# Altium PCB PCB1.PcbDoc (part 2 of 5)
Units mm, origin at the board's own origin, x right, y up, seen from the top; angles counter-clockwise.
Board outline 160 x 110 mm, 4 copper layers (Top Layer, Power Layer, GND Layer, Bottom Layer), stack 1.714 mm thick; 504 components, 362 nets, 1765 pads, 999 vias.
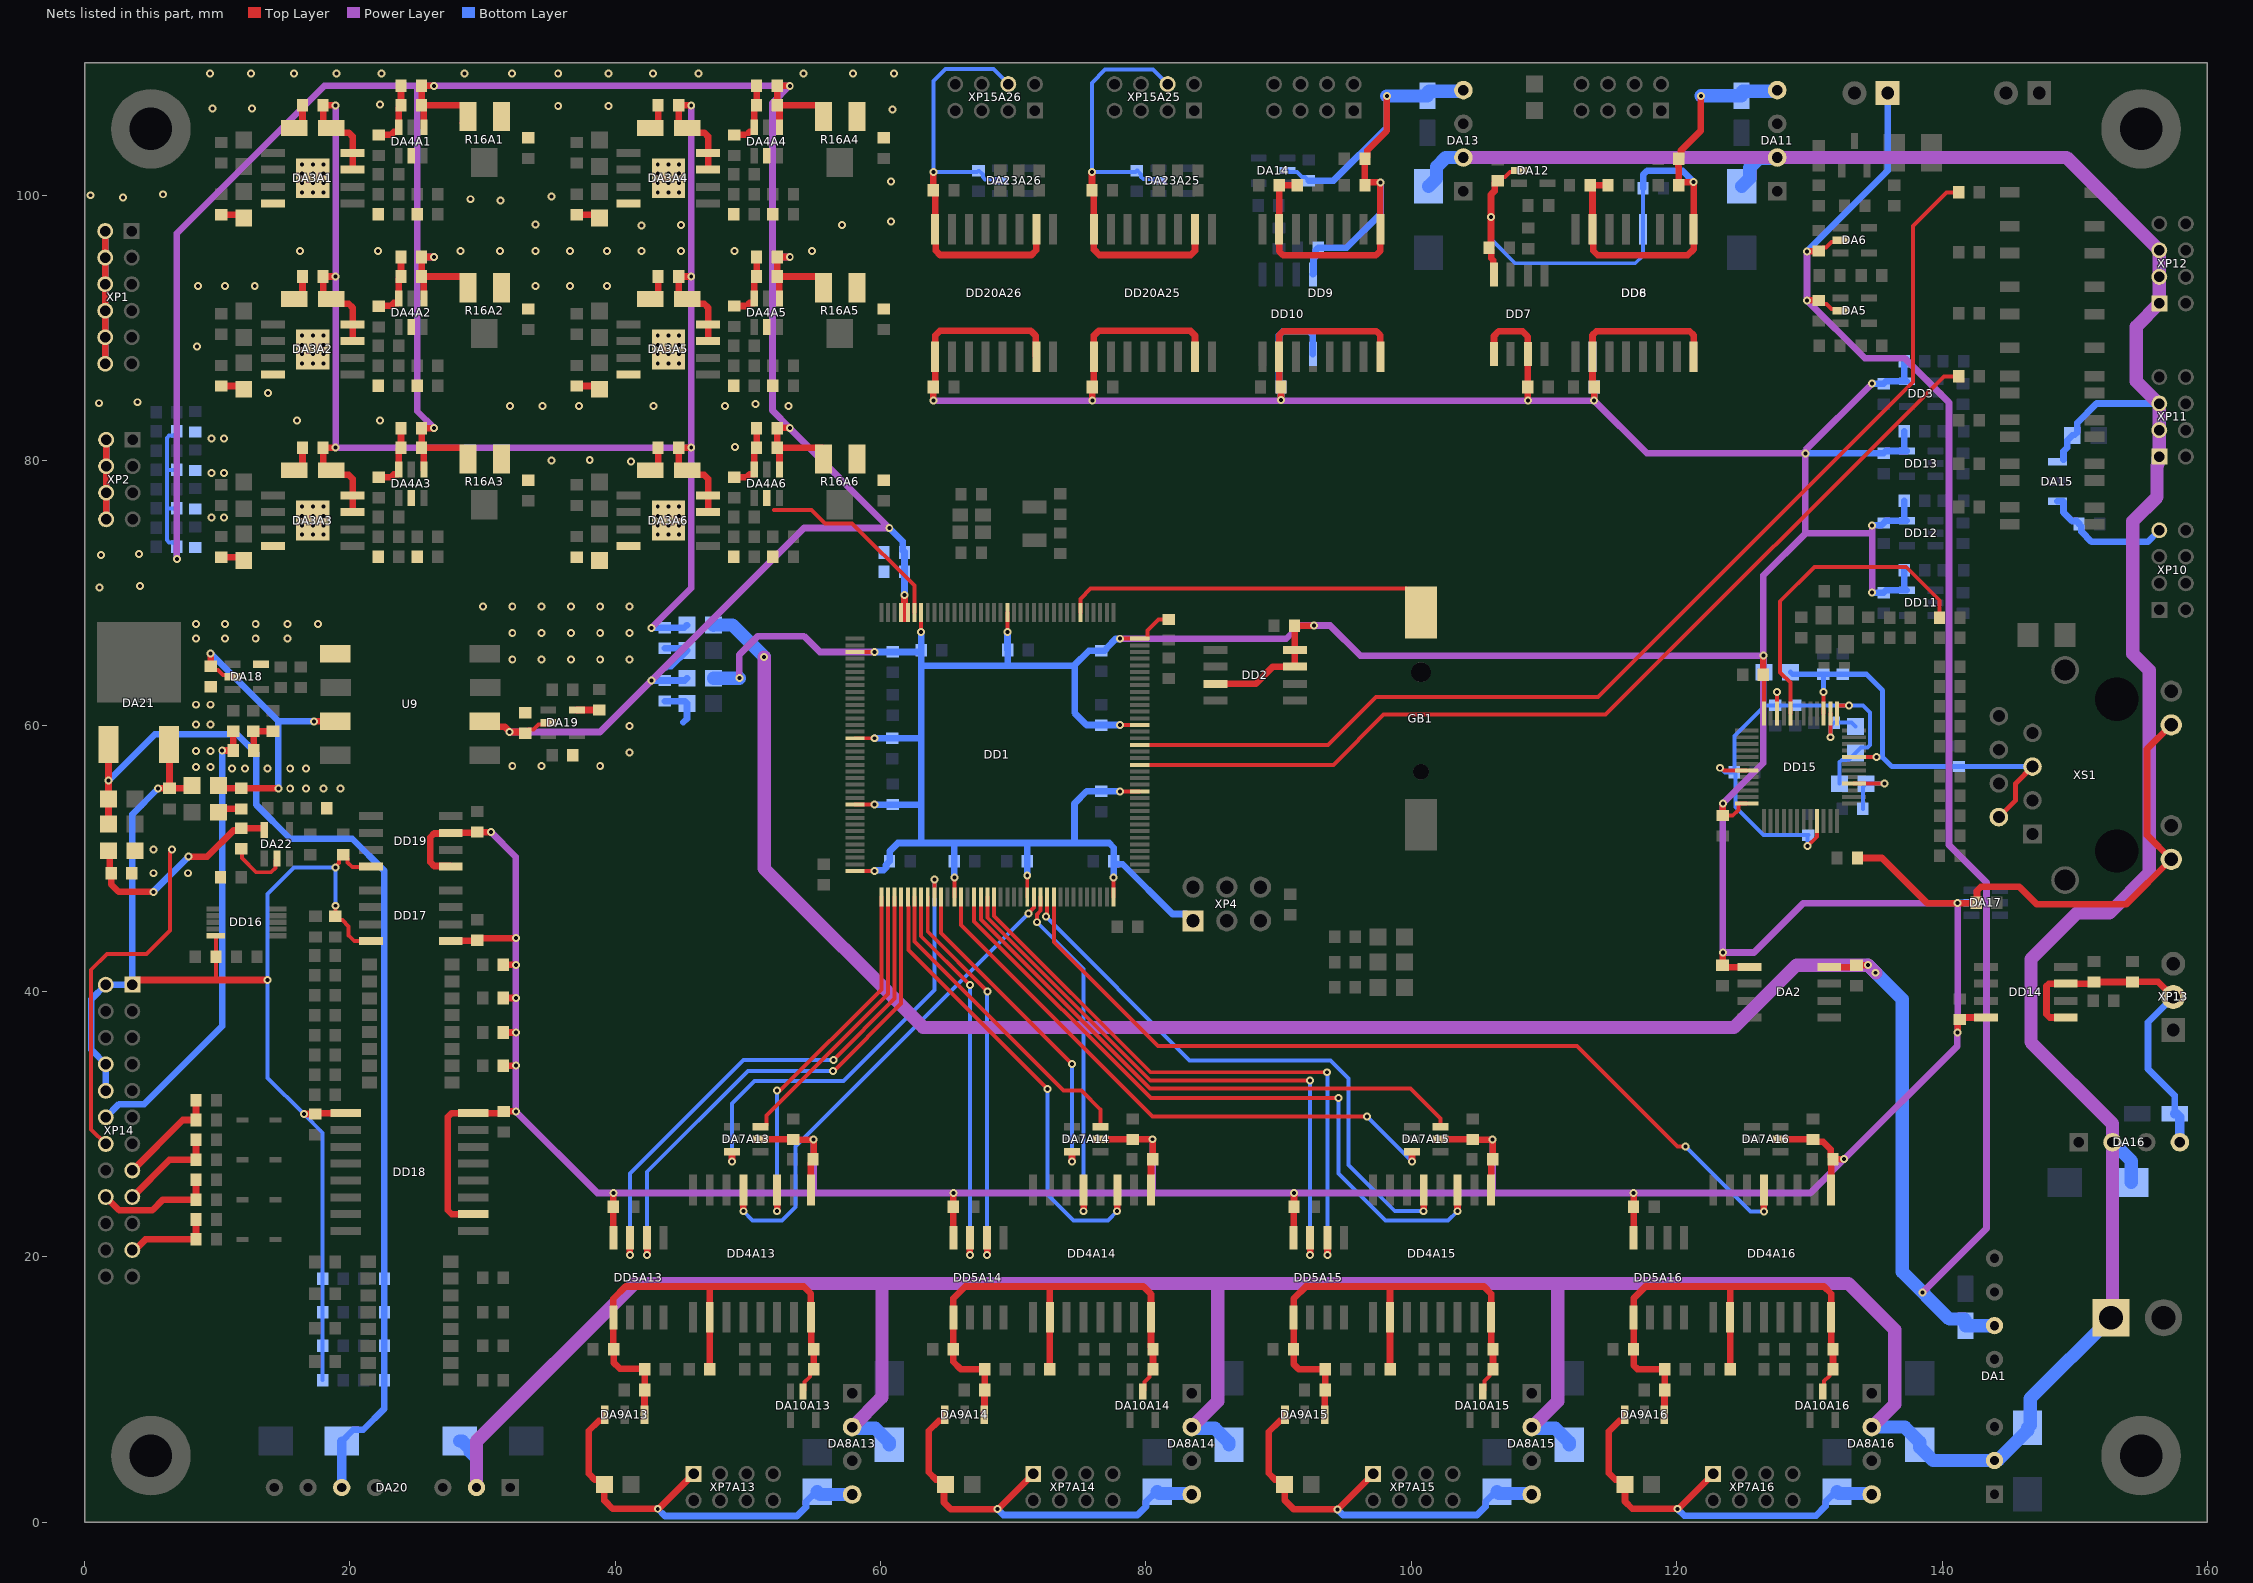
[diagram p4: the nets of this part, all layers, seen from the top]

## Part data
C1 C2 C32A1 C32A2 C32A3 C32A4 C32A5 C32A6 C44A13 C44A14 C44A15 C44A16 C48A13 C48A14 C48A15 C48A16 C55 C59 C65 C68 C81 C84 C115 C119: library part Capacitor_Polar
  C1 C44A13 C44A14 C44A15 C44A16 C55 C65 C81 C115 C119: Model="TECAP, 10 мкФ, 35 В, тип C, 10%"
  C2 C32A1 C32A2 C32A3 C32A4 C32A5 C32A6 C59 C68 C84: Model="TECAP, 10 мкФ, 10 В, тип A, 10%"
  C48A13 C48A14 C48A15 C48A16: Model="TECAP, 10 мкФ, 25 В, тип B, 10%"
C3 C4 C5 C7 C8 C9 C10 C11 C13 C14 C15 C16 C17 C18 C19 C20 C21 C22 C23 C24 C25 C26 C27 C28 C29A1 C29A2 C29A3 C29A4 C29A5 C29A6 C30A1 C30A2 C30A3 C30A4 C30A5 C30A6 C31A1 C31A2 C31A3 C31A4 C31A5 C31A6 C33A1 C33A2 C33A3 C33A4 C33A5 C33A6 C34A1 C34A2 C34A3 C34A4 C34A5 C34A6 C35A1 C35A2 C35A3 C35A4 C35A5 C35A6 C36A1 C36A2 C36A3 C36A4 C36A5 C36A6 C37A7 C37A8 C37A9 C37A10 C38 C39 C40 C41 C42 C43 C45A13 C45A14 C45A15 C45A16 C46A13 C46A14 C46A15 C46A16 C47A13 C47A14 C47A15 C47A16 C49A13 C49A14 C49A15 C49A16 C50A13 C50A14 C50A15 C50A16 C51A13 C51A14 C51A15 C51A16 C52A13 C52A14 C52A15 C52A16 C53A13 C53A14 C53A15 C53A16 C54A13 C54A14 C54A15 C54A16 C56 C57 C58 C60 C61 C62 C63 C64 C66 C67 C69 C70 C71 C72 C73 C74 C75 C76 C77 C78 C79 C80 C82 C83 C85 C86 C88 C89 C90 C91 C93 C95 C96 C97 C98 C99 C100 C101 C102 C103 C104 C105 C106 C107 C108 C109 C110 C111 C112 C113 C114 C116 C117 C118 C120 C121 C122 C123 C124A25 C124A26 C125A25 C125A26 C126A25 C126A26 C127A25 C127A26: library part Capacitor, Manufacturer=Murata
  C3 C4 C5 C8 C10 C11 C14 C16 C17 C18 C19 C20 C21 C22 C23 C25 C26 C27 C28 C29A1 C29A2 C29A3 C29A4 C29A5 C29A6 C31A1 C31A2 C31A3 C31A4 C31A5 C31A6 C33A1 C33A2 C33A3 C33A4 C33A5 C33A6 C35A1 C35A2 C35A3 C35A4 C35A5 C35A6 C37A7 C37A8 C37A9 C37A10 C38 C39 C40 C43 C45A13 C45A14 C45A15 C45A16 C46A13 C46A14 C46A15 C46A16 C47A13 C47A14 C47A15 C47A16 C49A13 C49A14 C49A15 C49A16 C50A13 C50A14 C50A15 C50A16 C53A13 C53A14 C53A15 C53A16 C54A13 C54A14 C54A15 C54A16 C56 C57 C58 C60 C61 C62 C63 C64 C66 C67 C69 C70 C71 C72 C74 C78 C79 C80 C82 C83 C85 C86 C88 C89 C90 C91 C93 C95 C96 C97 C98 C99 C100 C101 C102 C103 C104 C105 C106 C108 C109 C110 C111 C112 C113 C114 C117 C118 C120 C121 C122 C123 C124A25 C124A26 C125A25 C125A26 C127A25 C127A26: Model=GRM188R71H104KA93D
  C7 C13: Model=GRM1885C1H180FA01D
  C9 C15 C24 C36A1 C36A2 C36A3 C36A4 C36A5 C36A6: Model=GRM188R61H225KE11D
  C30A1 C30A2 C30A3 C30A4 C30A5 C30A6: Model=GRM1885C1H100JA01D
  C34A1 C34A2 C34A3 C34A4 C34A5 C34A6 C52A13 C52A14 C52A15 C52A16 C126A25 C126A26: Model=GRM188R71H103JA01D
  C41 C107: Model=GRM1885C1H101JA01D
  C42 C75 C76 C77: Model=GRM188R61H105KAALD
  C51A13 C51A14 C51A15 C51A16 C73 C116: Model=GRM219R71H334KA88D
C6 C12 C87 C92 C94: library part Capacitor, Manufacturer=Yageo
  C6 C12 C92 C94: Model=CC0603CRNPO9BN8R0
  C87: Model=CC1206KKX7RDBB102
DA1: library part TMR3, Manufacturer="Traco Power", Model="TMR 3-2411"
DA2: library part KFXXBD-TR, Manufacturer=STMicroelectronics, Model=KF33BD-TR
DA3A1 DA3A2 DA3A3 DA3A4 DA3A5 DA3A6 DD8 DD16: Manufacturer="Analog Devices"
  DA3A1 DA3A2 DA3A3 DA3A4 DA3A5 DA3A6: Model=ADA4817-1ARDZ
  DD8: Model=ADM3054BRWZ
  DD16: Model=ADM101EARM
DA4A1 DA4A2 DA4A3 DA4A4 DA4A5 DA4A6: library part TLV3501, Manufacturer="Texas Instruments", Model=TLV3501AIDBVR
DA5 DA6 DA10A13 DA10A14 DA10A15 DA10A16 DA12 DA14 DA18 DA19 DA23A25 DA23A26: library part LMC7101, Manufacturer="Texas Instruments", Model=LMC7101BIM5
DA7A13 DA7A14 DA7A15 DA7A16: library part SN74LVC1G3157, Manufacturer="Texas Instruments", Model=SN74LVC1G3157DBV
DA8A13 DA8A14 DA8A15 DA8A16 DA11 DA13 DA16: library part TME, Manufacturer="Traco Power"
  DA8A13 DA8A14 DA8A15 DA8A16: Model="TME 2412S"
  DA11 DA13 DA16: Model="TME 2405S"
DA9A13 DA9A14 DA9A15 DA9A16 DA15: library part LD2981ABU50TR, Manufacturer=STMicroelectronics
  DA9A13 DA9A14 DA9A15 DA9A16: Model=L78L05ABUTR
  DA15: Model=L78L12ABUTR
DA17: library part TPD4S009, Manufacturer="Texas Instruments", Model=TPD4S009DBVR
DA20: library part TMR4, Manufacturer="Traco Power", Model="TMR 4-2415"
DA21: library part L78M, Manufacturer=STMicroelectronics, Model=L78M05CDT-TR
DA22: library part LM7301IM5, Manufacturer="Texas Instruments", Model=LM7301IM5X/NOPB
DD1: library part STM32F405ZG, Manufacturer=STMicroelectronics, Model=STM32F405ZGT6
DD2: library part W25Q, Manufacturer=Winbond, Model=W25Q16JVSNIQ
DD3 DD11 DD12 DD13: library part SN74LVC1G17, Manufacturer="Texas Instruments", Model=SN74LVC1G17DBV
DD4A13 DD4A14 DD4A15 DD4A16 DD18: library part ADUM1400, Manufacturer="Analog Devices", Model=ADUM1400CRW
DD5A13 DD5A14 DD5A15 DD5A16: library part ADUM1200, Manufacturer="Analog Devices", Model=ADUM1200CR
DD6 DD9 DD20A25 DD20A26: library part ADUM1401, Manufacturer="Analog Devices", Model=ADUM1401CRW
DD7 DD10 DD14 DD19: library part ADUM1100, Manufacturer="Analog Devices", Model=ADUM1100BR
DD15: library part W5100S, Manufacturer=Wiznet, Model=W5100S-L
DD17: library part ADUM1201, Manufacturer="Analog Devices", Model=ADUM1201CR
GB1: library part Accumulator, Manufacturer=Connfly, Model=DS1092-12-N8S
L1 L2 L3 L4 L5 L6 L7: library part Inductor, Manufacturer=Murata, Model=BLM21PG221SN1D
R1 R2 R3 R4 R5 R6 R7 R8 R9A1 R9A2 R9A3 R9A4 R9A5 R9A6 R10A1 R10A2 R10A3 R10A4 R10A5 R10A6 R11A1 R11A2 R11A3 R11A4 R11A5 R11A6 R12A1 R12A2 R12A3 R12A4 R12A5 R12A6 R13A1 R13A2 R13A3 R13A4 R13A5 R13A6 R14A1 R14A2 R14A3 R14A4 R14A5 R14A6 R15A1 R15A2 R15A3 R15A4 R15A5 R15A6 R17A7 R17A8 R17A9 R17A10 R18A7 R18A8 R18A9 R18A10 R19 R20 R21 R22 R23 R24 R25 R26 R27 R28A13 R28A14 R28A15 R28A16 R29A13 R29A14 R29A15 R29A16 R30A13 R30A14 R30A15 R30A16 R31 R32 R33 R34 R35 R36 R37 R38 R39 R40 R41 R42 R43 R44 R45 R46 R47 R48 R49 R50 R51 R52 R53 R54 R55 R56 R57 R58 R59 R60 R61 R62 R63 R64 R65 R66 R67 R68 R69 R70 R71 R72 R73 R74 R75 R76 R77 R78 R79 R80 R81 R82 R83 R84 R85 R86 R87 R88 R89 R90 R91 R92 R93 R94 R95 R96 R97 R98 R99 R100 R101 R102 R103 R104 R109 R110 R111 R112 R113 R114 R115 R116 R117A25 R117A26 R118A25 R118A26: library part Resistor, Manufacturer=Yageo
  R1 R2 R109 R111: Model=RC0805FR-070RL
  R3 R7 R12A1 R12A2 R12A3 R12A4 R12A5 R12A6 R13A1 R13A2 R13A3 R13A4 R13A5 R13A6 R14A1 R14A2 R14A3 R14A4 R14A5 R14A6 R15A1 R15A2 R15A3 R15A4 R15A5 R15A6 R17A7 R17A8 R17A9 R17A10 R18A7 R18A8 R18A9 R18A10 R19 R21 R23 R24 R27 R28A13 R28A14 R28A15 R28A16 R29A13 R29A14 R29A15 R29A16 R30A13 R30A14 R30A15 R30A16 R31 R32 R34 R35 R36 R37 R38 R39 R43 R44 R45 R53 R68 R69 R70 R71 R72 R73 R75 R76 R77 R78 R79 R80 R81 R86 R87 R89 R91 R92 R93 R95 R104 R110 R112 R113 R115 R116 R117A25 R117A26 R118A25 R118A26: Model=RC0603FR-0710KL
  R4 R5 R6 R22 R46 R47 R48 R49 R50 R51 R52 R96 R97 R98 R99: Model=RC0603FR-07200RL
  R8 R67: Model=RC0603JR-070RL
  R9A1 R9A2 R9A3 R9A4 R9A5 R9A6 R10A1 R10A2 R10A3 R10A4 R10A5 R10A6: Model=RC0805FR-071ML
  R11A1 R11A2 R11A3 R11A4 R11A5 R11A6: Model=RC0603FR-075K1L
  R20 R66: Model=RC0603FR-0712KL
  R25: Model=RC1210FR-0710RL
  R26 R40 R41 R42 R60 R63: Model=RC0603FR-071KL
  R33: Model=RC0805FR-07120RL
  R54 R55 R56 R57: Model=RC0603FR-0749R9L
  R58 R59 R61 R62: Model=RC0603FR-073R3L
  R64: Model=RC0603FR-07300RL
  R65: Model=RC0603FR-071ML
  R74: Model=RC0603FR-0722KL
  R82 R83 R84 R85: Model=RC0603FR-07390RL
  R88: Model=RC0603FR-07330RL
  R90 R94: Model=RC0603FR-07150KL
  R100 R101 R102 R103: Model=RC0603FR-070RL
  R114: Model=RC0603FR-076K04L
R16A1 R16A2 R16A3 R16A4 R16A5 R16A6: library part Resistor_Variable, Manufacturer=Bourns, Model=3224W-1-104E
R105 R106 R107 R108: library part Resistor
U1 U2 U3 U4: library part TLP291, Manufacturer=Toshiba, Model=TLP291(GB-TP,SE
U5 U6 U7: Manufacturer=Toshiba, Model=TLP127
U8 U10: library part TLP281-4, Manufacturer=Toshiba, Model=TLP291-4
U9: library part HCNR200, Manufacturer=Avago, Model=HCNR-200-500E
VD1 VD2 VD3: library part LED, Manufacturer=Kingbright
  VD1: Model=KP-2012MGC
  VD2: Model=KP-2012SEC
  VD3: Model=KP-2012EC
VD4 VD5 VD6 VD7: library part Diode_Zener, Manufacturer=Nexperia, Model=BZX384-C5V1
VT1: library part "MOSFET N-channel", Manufacturer=UMW, Model=AO3400A
XP1: library part Connector-12, Manufacturer=JST, Model=B12B-PHDSS
XP2 XP7A13 XP7A14 XP7A15 XP7A16 XP8 XP9 XP10 XP11 XP12 XP15A25 XP15A26: library part Connector-8, Manufacturer=JST, Model=B8B-PHDSS
XP3 XP5 XP6: library part Connector-2, Manufacturer=JST
  XP3: Model=B2P-VH
  XP5 XP6: Model=B2B-EH-A
XP4: library part Connector-6, Manufacturer=Connfly, Model=PLD-6
XP13: library part Connector-3, Manufacturer=JST, Model=B3B-EH-A
XP14: library part Connector-24, Manufacturer=JST, Model=B24B-PHDSS
XS1: Manufacturer=LINK-PP, Model=LPJD0012BENL
ZQ1: library part Quartz_Resonator_4-pin, Manufacturer=NDK, Model=NX2520SA-16MHZ-STD-CSW-5
ZQ2: library part Quartz_Resonator, Manufacturer=NDK, Model="NX3215SA- 32.768K-STD-MUA-8"
ZQ3: library part Quartz_Resonator_4-pin, Manufacturer=TXC, Model=7M-25.000MAAJ-T

## Free pads (board coordinates)
  round 6 hole 3.2: ""(5,5) ""(5,105) ""(155,5) ""(155,105)

## Via types
v1: diameter 0.6, hole 0.3, Top Layer to Bottom Layer, tented both sides, 927 vias
v2: diameter 0.6, hole 0.3, Top Layer to Bottom Layer, 72 vias

## Nets (pads, with @x,y where several pads share a name; then routed paths per layer and width w, separated by ;. In a path a pad name is that pad's centre, name@x,y a point inside that pad or via, vN(x,y) a via of type N, cw(c..) or ccw(c..) an arc to the next point about the centre after c; other vN are vias at no path point)
1V2A: C96.1 DD15.4 L4.2 | length 5.7
  Top Layer w0.3: DD15.4@133.375,55.65 v1(135.675,55.65)
  Bottom Layer w0.3: C96.1@134.025,53.75 134.025,55.4 L4.2@134.275,55.65 v1(135.675,55.65)
1V2D: C95.1 C99.1 C101.1 C102.1 DD15.13 DD15.22 DD15.31 DD15.45 L3.2 L4.1 | length 40.4
  Top Layer w0.3: v1(123.275,56.85) 123.356,56.85 123.556,56.65 DD15.31@125.275,56.65 ; DD15.22@127.575,60.95 127.575,61.8 v1(127.575,62.55) ; v1(129.875,50.95) 130.575,51.65 DD15.45@130.575,52.85 ; DD15.13@132.075,60.95 132.075,61.55 v1(132.975,61.55)
  Bottom Layer w0.3: v1(123.275,56.85) 123.625,56.5 C101.1@124.345,56.5 ; C95.1@127.575,61.56 C99.1@128.925,61.56 128.93,61.555 132.97,61.555 v1(132.975,61.55) 134.05,61.55 134.575,61.025 134.575,58.575 134.366,58.366 133.891,58.366 132.99,57.465 132.829,57.465 132.814,57.45 132.451,57.45 132.275,57.274 L4.1@132.275,55.65 ; v1(127.575,62.55) 127.575,61.71 C95.1@127.425,61.56 126.66,61.56 124.345,59.245 C101.1@124.345,56.5 ; v1(129.875,50.95) 129.875,51.72 C102.1@129.925,51.77 126.555,51.77 124.424,53.901 124.424,56.421 C101.1@124.345,56.5
1V2O: C91.1 DD15.14 L3.1 | length 4.7
  Top Layer w0.3: v1(131.575,59.15) DD15.14@131.575,60.95
  Bottom Layer w0.3: v1(131.575,59.15) 131.575,59.749 131.6,59.774 131.6,59.975 C91.1@131.875,60.25 133.175,60.25 L3.1@133.475,59.95
+3.3V: C5.1 C9.1 C10.2 C16.2 C17.1 C18.1 C19.1 C21.2 C22.2 C23.2 C25.1 C26.2 C27.1 C28.1 C43.1 C45A13.1 C45A14.1 C45A15.1 C45A16.1 C46A13.1 C46A14.1 C46A15.1 C46A16.1 C47A13.1 C47A14.1 C47A15.1 C47A16.1 C56.1 C57.1 C58.1 C66.1 C67.1 C78.1 C79.1 C80.1 C85.1 C88.1 C93.1 C98.1 C110.1 C111.1 C114.1 C124A25.1 C124A26.1 DA2.1 DA7A13.5 DA7A14.5 DA7A15.5 DA7A16.5 DA17.5 DD1.17 DD1.30 DD1.39 DD1.52 DD1.62 DD1.72 DD1.84 DD1.95 DD1.108 DD1.121 DD1.131 DD1.144 DD2.3 DD2.7 DD2.8 DD3.5 DD4A13.1 DD4A14.1 DD4A15.1 DD4A16.1 DD5A13.8 DD5A14.8 DD5A15.8 DD5A16.8 DD6.10 DD6.16 DD7.1 DD7.3 DD8.7 DD9.10 DD9.16 DD10.1 DD10.3 DD11.5 DD12.5 DD13.5 DD14.8 DD15.24 DD15.36 DD17.1 DD18.10 DD18.16 DD19.1 DD19.3 DD20A25.1 DD20A25.7 DD20A26.1 DD20A26.7 L2.1 L5.1 R8.2 R27.2 R43.2 R44.2 R45.2 R68.2 R89.1 R91.1 R92.1 R93.1 XP4.1 XS1.9 XS1.11 | length 728.7
  Top Layer w0.3: C111.1@31.47,30.82 C111.1@31.6,30.95 ; DD1.72@58.075,49.075 v1(59.55,49.075) ; DD1.62@58.075,54.075 v1(59.55,54.075) ; DD1.52@58.075,59.075 v1(59.55,59.075) ; DD1.39@58.075,65.575 v1(59.55,65.575) ; v1(63.05,67.075) DD1.30@63.05,68.55 ; DD1.84@65.55,47.1 65.55,47.825 65.55,48.57 v1(65.564,48.583) ; v1(69.55,67.075) DD1.17@69.55,68.55 ; DD1.95@71.05,47.1 v1@71.05,48.575 ; DD1.108@77.55,47.1 v1(77.55,48.575) ; v1(78.025,55.075) DD1.121@79.525,55.075 ; v1(78.05,60.075) DD1.131@79.525,60.075 ; v1(78.05,66.575) 78.8,66.575 DD1.144@79.525,66.575 80.1,66.575 80.1,67.2 80.925,68.025 R8.2@81.7,68.025 ; C93.1@123.476,53.249 124.224,53.249 124.651,53.676 124.651,54.15 DD15.36@125.275,54.15 ; C98.1@126.525,63.85 126.575,63.8 DD15.24@126.575,60.95
  Top Layer w0.5: DD17.1@27.6,43.8 29.55,43.8 C110.1@29.6,43.85 29.756,44.006 32.481,44.006 v1(32.5,44.025) ; DD19.1@27.6,49.4 27.55,49.45 26.343,49.45 26.05,49.743 26.05,51.607 26.343,51.9 27.55,51.9 DD19.3@27.6,51.95 29.55,51.95 C114.1@29.6,52 v1(30.625,52) ; DD18.10@29.3,23.2 29.296,23.204 27.668,23.204 27.375,23.496 27.375,30.524 27.668,30.816 29.296,30.816 DD18.16@29.3,30.82 C111.1@31.47,30.82 ; R93.1@31.55,34.4 v1(32.5,34.4) ; R92.1@31.55,36.9 v1(32.5,36.9) ; R91.1@31.55,39.5 v1(32.5,39.5) ; R89.1@31.55,42 v1(32.5,42) ; C111.1@31.6,30.95 v1(32.5,30.95) ; DD5A13.8@39.85,21.425 C47A13.1@39.85,23.775 v1(39.85,24.8) ; DA7A13.5@50.95,28.85 50.963,28.838 C45A13.1@53.387,28.838 ; C45A13.1@53.4,28.825 v1(54.95,28.825) 54.95,27.4 C46A13.1@54.9,27.35 ; DD4A13.1@54.74,25.025 54.74,27.04 C46A13.1@54.9,27.2 ; v1(63.975,84.525) C124A26.1@63.975,85.55 64.11,85.685 DD20A26.1@64.11,87.825 64.11,89.435 64.45,89.775 71.325,89.775 71.68,89.42 71.68,87.875 DD20A26.7@71.73,87.825 ; DD5A14.8@65.475,21.425 C47A14.1@65.475,23.775 v1(65.475,24.8) ; v1(75.95,84.525) C124A25.1@75.95,85.55 ; C124A25.1@76.075,85.575 DD20A25.1@76.075,87.825 76.075,89.425 76.425,89.775 83.35,89.775 83.695,89.43 DD20A25.7@83.695,87.825 ; DA7A14.5@76.575,28.85 78.975,28.85 v1(80.5,28.85) C46A14.1@80.5,27.35 ; DD4A14.1@80.375,25.025 C46A14.1@80.375,27.225 ; DD2.3@85.225,63.175 88.275,63.175 89.575,64.475 DD2.7@91.225,64.475 DD2.8@91.225,65.725 91.2,65.75 C25.1@91.2,67.55 91.212,67.562 92.662,67.562 v1(92.675,67.575) ; v1(90.175,84.574) C67.1@90.175,85.55 90.175,85.575 90.04,85.71 DD9.10@90.04,87.828 90.04,89.457 90.333,89.75 97.367,89.75 97.66,89.457 DD9.16@97.66,87.828 ; DD5A15.8@91.125,21.425 91.137,21.437 91.137,23.763 C47A15.1@91.15,23.775 v1(91.15,24.8) ; DA7A15.5@102.2,28.85 104.625,28.85 104.65,28.825 v1(106.125,28.825) C46A15.1@106.125,27.35 ; DD4A15.1@106.015,25.072 C46A15.1@106.015,27.287 ; DD7.1@106.226,88.038 106.226,89.397 106.575,89.746 108.375,89.746 108.776,89.345 DD7.3@108.776,88.037 108.776,85.551 C56.1@108.775,85.55 v1(108.775,84.525) ; v1(113.775,84.525) C57.1@113.775,85.55 113.655,85.67 DD6.10@113.655,87.828 113.655,89.457 113.948,89.75 120.982,89.75 121.275,89.457 DD6.16@121.275,87.828 ; DD5A16.8@116.75,21.425 C47A16.1@116.75,23.775 v1(116.75,24.8) ; v1(123.475,42.925) 123.462,42.912 123.462,41.987 C9.1@123.45,41.975 123.599,41.826 DA2.1@125.5,41.826 ; C93.1@123.475,53.25 v1(123.475,54.15) ; C98.1@126.525,63.85 v1(126.525,65.3) ; DA7A16.5@127.825,28.85 130.3,28.85 130.325,28.825 C45A16.1@130.275,28.825 130.45,28.65 131.05,28.65 131.6,28.1 131.6,27.525 C46A16.1@131.775,27.35 ; DD4A16.1@131.645,25.025 131.645,27.22 C46A16.1@131.775,27.35 ; v1(132.625,27.35) C46A16.1@131.775,27.35 ; R68.2@133.625,50.05 135.475,50.05 138.875,46.65 v1(141.175,46.65) 142.55,46.65 C88.1@142.575,46.675 142.629,46.729 142.629,47.582 142.921,47.875 145.825,47.875 147.15,46.55 153.876,46.55 XS1.9@157.275,49.949 155.45,51.775 155.45,58.254 XS1.11@157.275,60.079 ; v1(141.175,36.9) 141.194,36.919 141.194,37.725 141.469,38 141.818,38 141.843,38.025 DD14.8@143.325,38.025
  Power Layer w0.5: v1(30.625,52) 32.5,50.125 v1(32.5,44.025) v1(32.5,42) v1(32.5,39.5) v1(32.5,36.9) v1(32.5,34.4) v1(32.5,30.95) 38.65,24.8 v1(39.85,24.8) 54.95,24.8 ; v1(49.35,63.6) 49.35,65.375 50.75,66.775 54.217,66.775 55.417,65.575 v1(59.55,65.575) ; v1(54.95,28.825) 54.95,24.8 ; v1(59.55,59.075) v1@59.569,59.094 ; v1(63.975,84.525) v1(75.95,84.525) 90.099,84.525 90.148,84.574 v1(90.175,84.574) ; v1(78.05,66.575) 90.575,66.575 91.575,67.575 v1(92.675,67.575) 93.875,67.575 96.15,65.3 v1(126.525,65.3) ; v1(80.5,28.85) 80.5,24.8 ; v1@90.175,84.525 v1(108.775,84.525) v1(113.775,84.525) 117.75,80.55 v1(129.7,80.55) ; v1(106.125,28.825) 106.125,24.85 106.075,24.8 ; v1@134.706,85.781 129.719,80.794 129.719,80.569 v1(129.7,80.55) ; v1(134.725,70.05) 134.725,74.512 ; v1(134.725,75.1) 134.725,74.512 ; 54.95,24.8 v1(65.475,24.8) 80.5,24.8 ; 80.5,24.8 v1(91.15,24.8) 106.075,24.8 ; 106.075,24.8 v1(116.75,24.8) 130.075,24.8 v1(132.625,27.35) 141.156,35.881 141.156,36.881 v1(141.175,36.9) v1(141.175,46.65) 129.55,46.65 125.825,42.925 v1(123.475,42.925) v1(123.475,54.15) 126.525,57.2 v1(126.525,65.3) ; v1(126.525,65.3) 126.525,71.337 129.7,74.512 ; 129.7,74.512 v1(129.7,80.55) ; 129.7,74.512 134.725,74.512
  Bottom Layer w0.5: v1(59.55,49.075) 59.607,49.132 60.224,49.132 60.4,49.308 60.4,49.525 C16.2@60.675,49.8 60.675,50.55 61.3,51.175 65.575,51.175 ; v1(59.55,54.075) C17.1@60.9,54.075 63.025,54.075 63.05,54.1 ; v1(59.55,59.075) C18.1@60.875,59.075 63.025,59.075 63.05,59.1 ; v1(59.55,65.575) 60.9,65.575 62.925,65.575 C5.1@63.05,65.7 ; 63.05,51.2 63.05,54.1 ; v1(63.05,67.075) C5.1@63.05,65.7 ; v1(65.564,48.583) 65.557,48.59 65.557,49.793 C21.2@65.55,49.8 65.55,51.15 65.575,51.175 ; v1(69.55,67.075) 69.562,67.062 69.562,65.737 C10.2@69.575,65.725 69.575,64.575 ; v1(71.05,48.725) C22.2@71.05,49.8 71.05,51.15 71.025,51.175 ; 74.616,64.591 74.616,60.984 75.525,60.075 76.625,60.075 v1(78.05,60.075) ; v1(77.55,48.575) 77.562,48.587 77.562,49.963 77.575,49.975 77.575,50.825 77.225,51.175 74.608,51.175 ; C23.2@77.596,49.779 77.596,49.729 77.75,49.575 78.25,49.575 81.997,45.828 83.032,45.828 XP4.1@83.55,45.31 ; v1(78.025,55.075) C28.1@76.625,55.075 75.525,55.075 74.608,54.158 74.608,51.175 ; v1(78.05,66.575) 78.031,66.556 77.706,66.556 77.05,65.9 77.05,65.85 76.875,65.675 76.825,65.675 C26.2@76.625,65.675 75.7,65.675 74.575,64.55 69.575,64.55 63.05,64.55 ; v1(90.175,84.574) C66.1@90.175,85.55 90.025,85.7 DD10.3@90.025,88.037 90.025,89.45 90.325,89.75 92.275,89.75 92.575,89.45 DD10.1@92.575,88.037 ; DD8.7@113.655,87.828 113.655,85.67 C58.1@113.775,85.55 v1(113.775,84.525) ; v1(126.525,65.3) 126.544,65.281 126.544,64.081 L5.1@126.575,64.05 ; v1(129.7,80.55) C80.1@135.6,80.55 135.775,80.725 DD13.5@137.275,80.725 ; v1(134.725,70.05) C78.1@135.6,70.05 135.775,70.225 DD11.5@137.15,70.225 ; v1(134.725,75.1) 134.752,75.1 134.777,75.125 135.425,75.125 C79.1@135.6,75.3 135.775,75.475 DD12.5@137.275,75.475 ; v1(134.725,85.8) C43.1@135.6,85.8 135.775,85.975 DD3.5@137.275,85.975 ; R43.2@137.15,71.725 137.15,70.35 137.275,70.225 DD11.5@137.35,70.225 ; R44.2@137.15,76.975 137.15,75.6 DD12.5@137.275,75.475 ; R45.2@137.15,82.225 137.15,80.85 DD13.5@137.275,80.725 ; R27.2@137.15,87.475 137.15,86.1 DD3.5@137.275,85.975 ; DD12.5@137.35,75.475 DD12.5@137.275,75.475 ; DD13.5@137.35,80.725 DD13.5@137.275,80.725 ; DD3.5@137.35,85.975 DD3.5@137.275,85.975 ; v1(141.175,46.65) 141.188,46.662 142.212,46.662 DA17.5@142.225,46.675 ; 63.05,54.1 63.05,59.1 ; 63.05,59.1 63.05,64.55 ; 63.05,64.55 C5.1@63.05,65.7 ; 65.575,51.175 71.025,51.175 ; 71.025,51.175 74.608,51.175
  Bottom Layer w1: L2.1@47.4,63.6 v1(49.35,63.6)
+3.3VA: C8.2 C11.2 C14.1 C35A1.1 C35A2.1 C35A3.1 C35A4.1 C35A5.1 C35A6.1 C36A1.1 C36A2.1 C36A3.1 C36A4.1 C36A5.1 C36A6.1 C112.1 DA4A1.4 DA4A2.4 DA4A3.4 DA4A4.4 DA4A5.4 DA4A6.4 DA19.2 DD1.32 DD1.33 L2.2 R16A1.3 R16A2.3 R16A3.3 R16A4.3 R16A5.3 R16A6.3 R17A7.1 R17A8.1 R17A9.1 R17A10.1 U9.6 | length 251.6
  Top Layer w0.3: C112.1@33.2,59.45 33.475,59.725 33.825,59.725 34.225,60.125 34.825,60.125 DA19.2@34.95,60.25
  Top Layer w0.5: DA4A3.4@25.575,79.325 25.575,80.8 C35A3.1@25.4,80.975 ; DA4A2.4@25.575,92.225 25.55,92.25 25.55,93.725 C35A2.1@25.4,93.875 ; DA4A1.4@25.575,105.125 25.55,105.15 25.55,106.625 C35A1.1@25.4,106.775 ; v1(26.35,82.45) C36A3.1@25.4,82.45 C35A3.1@25.4,80.975 ; v1(26.35,95.35) C36A2.1@25.4,95.35 C35A2.1@25.4,93.875 ; v1(26.35,108.25) C36A1.1@25.4,108.25 C35A1.1@25.4,106.775 ; R16A1.3@28.5,105.475 28.9,105.875 R16A1.3@28.9,105.925 ; R16A1.3@28.5,106.775 C35A1.1@25.4,106.775 ; R16A2.3@28.625,92.75 R16A2.3@28.9,93.025 ; R16A2.3@28.625,93.875 C35A2.1@25.4,93.875 ; R16A3.3@28.9,80.125 28.9,80.575 28.5,80.975 C35A3.1@25.4,80.975 ; U9.6@30.15,60.35 30.55,59.95 31.65,59.95 32.025,59.575 v1(32.025,59.55) 33.1,59.55 C112.1@33.2,59.45 ; C35A6.1@52.2,80.85 C36A6.1@52.2,82.325 ; C36A6.1@52.225,82.475 v1(53.15,82.475) ; DA4A6.4@52.375,79.325 52.375,80.8 C35A6.1@52.2,80.975 R16A6.3@55.6,80.975 ; DA4A5.4@52.375,92.225 52.35,92.25 52.35,93.725 C35A5.1@52.2,93.875 ; DA4A4.4@52.375,105.125 52.375,106.6 C35A4.1@52.2,106.775 R16A4.3@55.3,106.775 ; C35A4.1@52.375,106.875 52.2,107.05 C36A4.1@52.2,108.25 v1(53.15,108.25) ; v1(53.15,95.35) C36A5.1@52.2,95.35 C35A5.1@52.2,93.875 ; R16A4.3@55.3,105.475 55.7,105.875 R16A4.3@55.7,105.925 ; R16A5.3@55.425,92.75 R16A5.3@55.7,93.025 ; R16A5.3@55.425,93.875 C35A5.1@52.2,93.875 ; R16A6.3@55.6,80.025 R16A6.3@55.7,80.125 ; 61.8,68.075 v1(61.8,69.875)
  Power Layer w0.5: v1(6.95,72.6) 6.95,97.125 18.075,108.25 25.075,108.25 ; v1(26.35,82.45) 25.075,83.725 25.075,95.336 ; v1(26.35,95.35) 25.089,95.35 25.075,95.336 ; v1(32.025,59.55) 38.85,59.55 54.225,74.925 v1(60.65,74.925) 53.2,82.375 53.2,82.398 53.169,82.429 v1@53.15,82.429 ; v1(53.15,82.475) 51.85,83.775 51.85,95.362 ; v1(53.15,95.35) 51.862,95.35 51.85,95.362 ; 25.075,95.336 25.075,108.25 ; 25.075,108.25 v1(26.35,108.25) v1(53.15,108.25) 51.85,106.95 51.85,95.362
  Bottom Layer w0.3: R17A10.1@6.95,73.5 6.95,73.55 6.675,73.825 6.376,73.825 6.2,74.001 6.2,76.4 ; R17A9.1@6.95,76.4 6.2,76.4 ; R17A8.1@6.95,79.3 6.2,79.3 ; R17A7.1@6.95,82.2 6.95,82.15 6.675,81.875 6.376,81.875 6.2,81.699 6.2,79.3 ; 6.2,76.4 6.2,79.3
  Bottom Layer w0.5: v1(6.95,72.6) R17A10.1@6.95,73.5 ; v1(42.725,63.425) C14.1@43.725,63.425 45.225,63.425 L2.2@45.4,63.6 ; v1@60.669,74.906 61.67,73.905 61.67,73.205 C11.2@61.8,73.075 ; v1(61.8,69.875) C11.2@61.8,73.125
+3.3VA_ETH: C86.1 C97.1 C100.1 DD15.8 DD15.15 L5.2 XS1.2 XS1.5 | length 34.1
  Top Layer w0.3: DD15.15@131.075,60.95 131.075,61.8 v1(131.075,62.55) ; DD15.8@133.375,57.65 v1(135.075,57.65)
  Top Layer w0.381: XS1.2@144.275,53.127 145.55,54.402 145.55,55.672 XS1.5@146.815,56.937
  Bottom Layer w0.381: L5.2@128.575,64.05 128.725,63.9 C97.1@131.05,63.9 ; v1(131.075,62.55) 131.063,62.563 131.063,63.887 C97.1@131.05,63.9 ; v1(135.075,57.65) 135.523,57.65 135.523,62.677 134.3,63.9 C100.1@132.517,63.9 C97.1@131.05,63.9 ; 135.523,57.627 136.213,56.937 C86.1@141.254,56.937 XS1.5@146.815,56.937
+5V: C2.1 C4.1 C39.1 C40.1 DA1.6 DA2.8 DA5.2 DA6.2 L1.1 XP5.1 | length 255.8
  Top Layer w0.3: C39.1@130.7,92.075 130.975,91.8 131.275,91.8 131.65,91.425 132.225,91.425 DA5.2@132.35,91.3 ; C40.1@130.7,95.8 130.975,96.075 131.25,96.075 131.65,96.475 132.225,96.475 DA6.2@132.35,96.6
  Top Layer w0.5: v1(129.825,92.075) C39.1@130.7,92.075 ; v1(129.825,95.775) 129.838,95.787 130.688,95.787 C40.1@130.7,95.8 ; DA2.8@131.5,41.826 133.326,41.826 133.525,42.025 C4.1@133.575,42.025 ; C4.1@133.55,41.975 v1(134.425,41.975)
  Power Layer w0.5: v1(129.825,95.775) v1(129.825,92.075) 134.175,87.725 137.175,87.725 140.525,84.375 140.525,51.025 143.35,48.2 143.35,22.125 v1(138.525,17.3)
  Power Layer w1: v1(51.225,65.2) 51.225,49.25 63.2,37.275 124.325,37.275 129.025,41.975 v1(134.425,41.975) v1(135,41.4)
  Bottom Layer w0.5: v1(129.825,95.775) 135.9,101.85 XP5.1@135.9,107.7
  Bottom Layer w1: L1.1@47.4,67.6 47.417,67.617 48.808,67.617 v1(51.225,65.2) ; v1(134.425,41.975) v1(135,41.4) 137,39.4 137,18.85 140.552,15.298 141.675,15.298 141.775,15.198 C2.1@141.775,14.8 DA1.6@143.95,14.8
+5V_DRVA13: C49A13.1 C50A13.1 C53A13.1 C54A13.1 DA9A13.1 DA10A13.2 DD4A13.10 DD4A13.16 DD5A13.1 R29A13.1 R30A13.1 | length 40.3
  Top Layer w0.3: DA10A13.2@54.15,9.825 54.275,9.95 54.275,10.55 54.675,10.95 54.675,11.25 C53A13.1@54.95,11.525
  Top Layer w0.5: C50A13.1@39.875,13.025 39.875,12.025 40.35,11.55 42.225,11.55 C54A13.1@42.225,9.95 ; C50A13.1@40.025,13.075 39.85,13.25 DD5A13.1@39.85,15.425 39.85,16.825 40.775,17.75 47.1,17.75 ; DA9A13.1@42.2,8.075 C54A13.1@42.2,9.925 ; DD4A13.10@47.12,15.425 47.12,17.73 47.1,17.75 ; R30A13.1@47.125,11.525 DD4A13.10@47.125,15.42 ; DD4A13.16@54.74,15.425 54.74,17.21 54.2,17.75 47.1,17.75 ; DD4A13.16@54.765,15.4 54.775,15.39 54.775,13.2 C49A13.1@54.95,13.025 C53A13.1@54.95,11.525
+5V_DRVA14: C49A14.1 C50A14.1 C53A14.1 C54A14.1 DA9A14.1 DA10A14.2 DD4A14.10 DD4A14.16 DD5A14.1 R29A14.1 R30A14.1 | length 40.3
  Top Layer w0.3: DA10A14.2@79.75,9.825 79.875,9.95 79.875,10.55 80.25,10.925 80.25,11.25 C53A14.1@80.525,11.525
  Top Layer w0.5: DA9A14.1@67.825,8.075 C54A14.1@67.825,9.925 ; C54A14.1@67.85,9.95 R29A14.1@67.85,11.525 66.025,11.525 65.475,12.075 C50A14.1@65.475,13.025 DD5A14.1@65.475,15.425 65.475,16.85 66.375,17.75 72.755,17.75 ; R30A14.1@72.75,11.525 72.753,11.528 72.753,15.423 DD4A14.10@72.755,15.425 72.755,17.75 ; C53A14.1@80.525,11.525 C49A14.1@80.525,13.025 80.375,13.175 80.375,17.175 79.8,17.75 72.755,17.75
+5V_DRVA15: C49A15.1 C50A15.1 C53A15.1 C54A15.1 DA9A15.1 DA10A15.2 DD4A15.10 DD4A15.16 DD5A15.1 R29A15.1 R30A15.1 | length 40.4
  Top Layer w0.3: DA10A15.2@105.375,9.825 105.5,9.95 105.5,10.625 105.875,11 105.875,11.25 C53A15.1@106.15,11.525
  Top Layer w0.5: DA9A15.1@93.475,8.075 C54A15.1@93.475,9.925 ; C54A15.1@93.5,9.95 R29A15.1@93.5,11.525 91.5,11.525 91.125,11.9 C50A15.1@91.125,13.025 DD5A15.1@91.125,15.425 91.125,16.825 92.051,17.751 105.474,17.751 106.015,17.21 DD4A15.16@106.015,15.425 106.015,13.16 C49A15.1@106.15,13.025 C53A15.1@106.15,11.525 ; R30A15.1@98.395,11.53 DD4A15.10@98.395,15.425 98.395,17.75
+5V_DRVA16: C49A16.1 C50A16.1 C53A16.1 C54A16.1 DA9A16.1 DA10A16.2 DD4A16.10 DD4A16.16 DD5A16.1 R29A16.1 R30A16.1 | length 40.4
  Top Layer w0.3: DA10A16.2@131,9.825 131.118,9.943 131.118,10.618 131.5,11 131.5,11.25 C53A16.1@131.775,11.525
  Top Layer w0.5: DA9A16.1@119.075,8.075 C54A16.1@119.075,9.925 ; C54A16.1@119.1,9.95 R29A16.1@119.1,11.525 117.043,11.525 116.75,11.818 C50A16.1@116.75,13.025 116.75,16.85 117.65,17.75 124,17.75 ; R30A16.1@124.025,11.525 DD4A16.10@124.025,15.425 124.025,17.725 124,17.75 ; C53A16.1@131.775,11.525 C49A16.1@131.775,13.025 131.645,13.155 131.645,17.205 131.1,17.75 124,17.75
+5V_FS: C82.1 C83.1 C84.1 DA16.4 DD14.1 DD14.3 XP13.2 | length 26.7
  Top Layer w0.5: DD14.1@149.325,38.025 148.125,38.025 147.875,38.275 147.875,40.399 148.051,40.575 151.325,40.575 C83.1@151.45,40.7 C82.1@154.35,40.7 154.375,40.725 156.275,40.725 XP13.2@157.425,39.575
  Bottom Layer w0.5: XP13.2@157.425,39.575 155.525,37.675 155.525,34.15 157.525,32.15 C84.1@157.525,30.775
  Bottom Layer w0.7: C84.1@157.525,30.775 157.675,30.775 157.925,30.525 DA16.4@157.925,28.625
+5V_HW: C103.1 C108.1 C109.1 C117.1 C118.1 DA21.3 DD16.10 DD17.8 DD18.1 DD19.8 L6.1 R105.2 R106.2 R107.2 R108.2 XP14.1 XP14.2 XP14.8 XP14.10 | length 104.9
  Top Layer w0.3: DD16.10@9.9,44.2 C103.1@9.9,42.6 9.9,40.95 9.95,40.9 ; C109.1@17.4,30.75 C109.1@17.47,30.82 ; v1(18.9,46.45) C108.1@18.9,45.65 19.175,45.375 19.424,45.375 19.9,44.899 19.9,44.225 20.325,43.8 DD17.8@21.6,43.8 ; v1(18.9,49.325) 18.9,49.406 19.175,49.681 19.175,50.025 19.45,50.3 C117.1@19.5,50.3 19.55,50.3 19.825,50.025 19.825,49.725 20.176,49.374 DD19.8@21.496,49.374
  Top Layer w0.5: XP14.1@3.6,40.5 3.95,40.85 v1(13.8,40.85) ; v1(5.55,55.3) C118.1@6.4,55.3 ; DA21.3@6.4,58.575 C118.1@6.4,55.3 ; L6.1@8.1,55.5 7.9,55.3 C118.1@6.4,55.3 ; v1(16.525,30.75) C109.1@17.4,30.75 ; C109.1@17.47,30.82 DD18.1@19.7,30.82
  Bottom Layer w0.3: R105.2@17.95,10.7 R106.2@17.95,13.275 R107.2@17.95,15.8 R108.2@17.95,18.325 17.95,29.325 v1(16.525,30.75) 13.8,33.475 v1(13.8,40.85) 13.8,47.325 15.8,49.325 v1(18.9,49.325) v1(18.9,46.45)
  Bottom Layer w0.5: XP14.10@1.6,32.5 XP14.8@1.6,34.5 0.509,35.591 0.509,39.409 XP14.2@1.6,40.5 XP14.1@3.6,40.5 3.6,53.35 v1(5.55,55.3)
+5V_PS: C68.1 C69.1 C70.1 C72.1 DA13.4 DA14.2 DD9.1 DD9.7 DD10.8 R37.1 R38.1 R39.1 | length 56.2
  Top Layer w0.5: DD9.7@90.04,97.428 90.04,95.768 90.333,95.475 97.325,95.475 97.667,95.817 97.667,100.967 v1(97.675,100.975) ; DD9.7@90.05,97.438 C69.1@90.05,100.75 R39.1@91.4,100.75 ; R37.1@96.5,100.75 R37.1@96.5,100.8 ; v1@97.648,100.975 96.675,100.975 R37.1@96.5,100.8 ; v1(98.15,107.475) 98.15,104.85 96.675,103.375 96.675,102.925 R38.1@96.5,102.75 R37.1@96.5,100.8
  Bottom Layer w0.3: DA14.2@90.65,101.863 90.775,101.738 91.387,101.738 91.75,101.375 92,101.375 C72.1@92.275,101.1
  Bottom Layer w0.5: C72.1@92.275,101.1 94.127,101.1 98.15,105.123 v1(98.15,107.475) ; DD10.8@92.575,94.037 92.625,94.087 92.625,95.2 92.8,95.375 92.8,95.863 C70.1@92.95,96.013 ; C70.1@92.975,96.038 95.113,96.038 97.675,98.6 v1(97.675,100.975) ; C68.1@101.2,107.475 C68.1@101.225,107.5
  Bottom Layer w1: v1(98.15,107.475) C68.1@101.2,107.475 ; C68.1@101.225,107.5 101.225,107.748 101.325,107.848 103.848,107.848 DA13.4@103.925,107.925
+5V_PS_CAN: C59.1 C60.1 C61.1 C62.1 C64.1 DA11.4 DA12.2 DD6.1 DD6.7 DD7.8 DD8.13 R32.1 R34.1 R35.1 | length 68.1
  Top Layer w0.3: C61.1@105.85,96.038 C61.1@106.024,95.863 ; C64.1@106.35,101.113 106.612,101.375 107.075,101.375 107.437,101.737 108,101.737 DA12.2@108.125,101.862
  Top Layer w0.5: C61.1@105.85,96.038 106,96.188 v1@106,98.348 ; v1(106,98.375) 106,100.05 106.275,100.325 106.275,100.925 106.45,101.1 C64.1@106.5,101.1 ; C61.1@106.024,95.863 106.024,95.251 106.176,95.099 106.176,94.087 DD7.8@106.226,94.037 ; C60.1@113.475,100.75 C60.1@113.65,100.75 ; C60.1@113.65,100.763 C60.1@113.65,100.75 ; R35.1@114.875,100.75 C60.1@113.65,100.75 ; 120.125,102.15 R34.1@120.125,102.75 ; R32.1@120.15,100.75 R32.1@120.15,100.8 ; 120.15,102.15 R32.1@120.15,100.8 ; R34.1@120.15,102.75 120.325,102.925 120.325,103.375 121.825,104.875 v1(121.825,107.475) ; C60.1@113.65,100.75 113.65,100.237 113.655,100.232 DD6.7@113.655,97.428 113.705,97.378 113.705,95.82 114.05,95.475 120.825,95.475 121.271,95.921 121.271,97.423 DD6.1@121.275,97.428 v1(121.275,101) 121.248,101 121.223,100.975 120.325,100.975 R32.1@120.15,100.8
  Bottom Layer w0.3: v1(106,98.375) 106,96.7 107.825,94.875 116.875,94.875 117.465,95.465 DD8.13@117.465,97.428 C62.1@117.465,100.53
  Bottom Layer w0.5: C62.1@117.465,100.53 117.465,101.54 117.767,101.842 120.433,101.842 v1(121.275,101)
  Bottom Layer w1: v1(121.825,107.475) 121.85,107.5 C59.1@124.875,107.5 124.875,107.748 124.975,107.848 127.498,107.848 DA11.4@127.575,107.925
+5V_SFA25: C125A25.1 C127A25.1 DA23A25.2 DD20A25.10 DD20A25.16 XP15A25.4 | length 34.2
  Top Layer w0.5: v1(75.925,101.75) C125A25.1@75.925,100.375 76.075,100.225 DD20A25.16@76.075,97.425 76.075,95.9 76.475,95.5 83.375,95.5 83.695,95.82 DD20A25.10@83.695,97.425
  Bottom Layer w0.3: C127A25.1@79.31,101.848 79.212,101.75 v1(75.925,101.75) 75.925,108.475 76.925,109.475 80.525,109.475 XP15A25.4@81.625,108.375 ; C127A25.1@79.36,101.848 79.635,101.573 79.635,101.386 79.811,101.211 80.81,101.211 DA23A25.2@80.935,101.086
+5V_SFA26: C125A26.1 C127A26.1 DA23A26.2 DD20A26.10 DD20A26.16 XP15A26.4 | length 34.1
  Top Layer w0.5: C125A26.1@63.975,100.375 v1(63.975,101.75) ; C125A26.1@64.025,100.375 64.11,100.29 DD20A26.16@64.11,97.425 64.15,97.385 64.15,95.825 64.475,95.5 71.375,95.5 71.73,95.855 DD20A26.10@71.73,97.425
  Bottom Layer w0.3: v1(63.975,101.75) 63.975,108.6 64.875,109.5 68.5,109.5 XP15A26.4@69.625,108.375 ; v1@64.025,101.75 67.277,101.75 C127A26.1@67.375,101.848 ; C127A26.1@67.425,101.848 67.7,101.573 67.7,101.373 67.876,101.197 68.889,101.197 DA23A26.2@69,101.086
+5VA: C3.1 C31A1.1 C31A2.1 C31A3.1 C31A4.1 C31A5.1 C31A6.1 C32A1.1 C32A2.1 C32A3.1 C32A4.1 C32A5.1 C32A6.1 DA3A1.7 DA3A1.8 DA3A2.7 DA3A2.8 DA3A3.7 DA3A3.8 DA3A4.7 DA3A4.8 DA3A5.7 DA3A5.8 DA3A6.7 DA3A6.8 L1.2 | length 140.1
  Top Layer w0.5: C31A2.1@17.957,93.707 C31A2.1@17.975,93.725 ; C31A2.1@17.975,93.875 C31A2.1@17.975,93.725 ; C31A1.1@17.975,106.775 17.975,105.425 18.325,105.075 C32A1.1@18.6,105.075 ; C31A1.1@18.15,106.775 v1(18.925,106.775) ; C32A1.1@18.65,105.075 19,104.725 19.907,104.725 20.2,104.432 DA3A1.8@20.2,103.175 DA3A1.7@20.2,101.925 ; v1(18.925,80.975) 18.906,80.956 18.127,80.956 C31A3.1@17.975,80.975 17.975,79.625 18.325,79.275 C32A3.1@18.6,79.275 18.95,78.925 19.907,78.925 20.2,78.632 DA3A3.8@20.2,77.375 DA3A3.7@20.2,76.125 ; v1(18.925,93.875) 18.125,93.875 C31A2.1@17.975,93.725 ; DA3A2.7@20.2,89.025 DA3A2.8@20.2,90.275 20.2,91.532 19.907,91.825 18.675,91.825 17.975,92.525 C31A2.1@17.975,93.725 ; C31A6.1@44.775,80.975 44.775,79.625 45.125,79.275 C32A6.1@45.425,79.275 45.775,78.925 46.707,78.925 47,78.632 DA3A6.7@47,76.125 ; C31A5.1@44.775,93.875 44.775,92.525 45.125,92.175 C32A5.1@45.425,92.175 45.775,91.825 46.707,91.825 47,91.532 DA3A5.8@47,90.275 DA3A5.7@47,89.025 ; C31A5.1@45,93.875 v1(45.725,93.875) ; C31A6.1@45.025,80.975 v1(45.725,80.975) ; v1(45.725,106.775) C31A4.1@44.775,106.775 44.775,105.425 45.125,105.075 C32A4.1@45.425,105.075 45.775,104.725 46.707,104.725 47,104.432 DA3A4.7@47,101.925
  Power Layer w0.5: v1@18.906,80.981 18.9,80.975 v1(18.925,80.975) ; v1(18.925,106.775) v1(18.925,93.875) v1(18.925,80.975) ; v1(42.725,67.4) 45.725,70.4 v1(45.725,80.975) ; v1(45.725,106.775) v1(45.725,80.975) ; v1(18.925,80.975) v1(45.725,80.975)
  Bottom Layer w0.5: v1(42.725,67.4) C3.1@43.725,67.4 45.2,67.4 L1.2@45.4,67.6
+5VA_HW: C105.1 C122.1 DA18.2 L6.2 U9.3 | length 24
  Top Layer w0.3: C105.1@9.5,64.5 9.775,64.225 10.05,64.225 10.45,63.825 11.025,63.825 DA18.2@11.15,63.7
  Top Layer w0.5: C105.1@9.5,64.5 v1(9.5,65.475) ; L6.2@10.1,55.5 10.3,55.3 C122.1@11.75,55.3 ; C122.1@11.8,55.3 v1(14.6,55.3) ; v1(17.3,60.35) U9.3@18.875,60.35
  Bottom Layer w0.5: v1(9.5,65.475) 14.625,60.35 ; v1(14.6,55.3) 14.6,60.325 14.625,60.35 ; v1(17.3,60.35) 14.625,60.35
+12V: C74.1 DA15.1 XP10.7 | length 9.8
  Bottom Layer w0.5: DA15.1@148.7,76.925 149.115,76.925 149.15,76.89 149.15,76.1 149.8,75.45 150.15,75.45 150.325,75.275 C74.1@150.325,75.225 ; C74.1@150.5,75.05 150.5,74.65 151.275,73.875 155.5,73.875 XP10.7@156.375,74.75
+12V_DRVA13: C48A13.1 C51A13.2 DA8A13.4 DA9A13.3 XP7A13.1 | length 31.8
  Top Layer w0.5: DA9A13.3@39.165,8.04 39.165,7.625 38.75,7.625 38,6.875 38,3.65 38.44,3.21 38.79,3.21 C51A13.2@39.175,2.825 39.175,1.625 39.8,1 v1(43.2,1) ; v1@43.25,0.975 XP7A13.1@45.9,3.625
  Bottom Layer w0.5: v1(43.2,1) 43.75,0.45 53.7,0.45 54.375,1.125 54.375,1.525 55.125,2.275 C48A13.1@55.225,2.275
  Bottom Layer w1: C48A13.1@55.225,2.275 55.425,2.075 DA8A13.4@57.85,2.075
+12V_DRVA14: C48A14.1 C51A14.2 DA8A14.4 DA9A14.3 XP7A14.1 | length 32
  Top Layer w0.5: C51A14.2@64.775,2.825 64.775,1.475 65.275,0.975 v1(68.8,0.975) 68.819,0.994 68.869,0.994 XP7A14.1@71.5,3.625 ; DA9A14.3@64.825,8.075 64.825,7.66 64.79,7.625 64.375,7.625 63.625,6.875 63.625,3.75 64.165,3.21 64.515,3.21 C51A14.2@64.9,2.825
  Bottom Layer w0.5: v1(68.8,0.975) 69.25,0.525 79.35,0.525 80,1.175 80,1.525 80.75,2.275 C48A14.1@80.85,2.275
  Bottom Layer w1: C48A14.1@80.85,2.275 80.973,2.152 83.373,2.152 DA8A14.4@83.45,2.075
+12V_DRVA15: C48A15.1 C51A15.2 DA8A15.4 DA9A15.3 XP7A15.1 | length 31.7
  Top Layer w0.5: DA9A15.3@90.475,8.075 90.475,7.66 90.44,7.625 90.075,7.625 89.25,6.8 89.25,3.675 89.715,3.21 90.065,3.21 C51A15.2@90.45,2.825 90.45,1.65 91.15,0.95 v1(94.425,0.95) ; v1@94.45,0.95 XP7A15.1@97.125,3.625
  Bottom Layer w0.5: v1(94.425,0.95) 94.85,0.525 104.95,0.525 105.6,1.175 105.6,1.525 106.35,2.275 C48A15.1@106.45,2.275
  Bottom Layer w1: C48A15.1@106.45,2.275 106.573,2.152 108.998,2.152 DA8A15.4@109.075,2.075
+12V_DRVA16: C48A16.1 C51A16.2 DA8A16.4 DA9A16.3 XP7A16.1 | length 31.7
  Top Layer w0.5: DA9A16.3@116.075,8.075 116.075,7.66 116.04,7.625 115.675,7.625 114.875,6.825 114.875,3.7 115.365,3.21 115.715,3.21 C51A16.2@116.1,2.825 116.1,1.55 116.65,1 120.125,1 XP7A16.1@122.75,3.625
  Bottom Layer w0.5: v1@120.094,0.956 120.575,0.475 130.5,0.475 131.225,1.2 131.225,1.525 131.975,2.275 C48A16.1@132.075,2.275
  Bottom Layer w1: C48A16.1@132.075,2.275 132.198,2.152 134.623,2.152 DA8A16.4@134.7,2.075
  other v1: 120.05,1
+24V: C1.1 C44A13.1 C44A14.1 C44A15.1 C44A16.1 C55.1 C65.1 C73.2 C81.1 C115.1 DA1.2 DA8A13.2 DA8A14.2 DA8A15.2 DA8A16.2 DA11.2 DA13.2 DA15.3 DA16.2 DA20.2 XP3.1 XP11.1 XP11.3 XP11.5 XP12.1 XP12.3 XP12.5 | length 367.8
  Power Layer w1: DA20.2@29.54,2.6 29.54,6.09 41.425,17.975 60.1,17.975 ; DA8A13.2@57.85,7.155 60.1,9.405 60.1,17.975 ; DA8A14.2@83.45,7.155 85.4,9.105 85.4,17.975 ; DA13.2@103.925,102.845 DA11.2@127.575,102.845 149.38,102.845 XP12.5@156.375,95.85 XP12.3@156.375,93.85 XP12.1@156.375,91.85 154.632,90.107 154.632,85.989 156.321,84.3 XP11.5@156.375,84.3 XP11.3@156.375,82.3 XP11.1@156.375,80.3 156.275,80.2 156.275,79.707 156.2,79.632 156.2,77.25 154.375,75.425 154.375,65.45 155.625,64.2 155.625,48.925 152.625,45.925 150.2,45.925 146.7,42.425 146.7,36.175 152.845,30.03 DA16.2@152.845,28.625 152.845,15.505 XP3.1@152.74,15.4 XP3.1@152.74,15.9 ; DA8A15.2@109.075,7.155 111.025,9.105 111.025,17.975 ; DA8A16.2@134.7,7.155 136.425,8.88 136.425,14.5 132.95,17.975 111.025,17.975 ; 60.1,17.975 85.4,17.975 ; 85.4,17.975 111.025,17.975
  Bottom Layer w0.5: DA15.3@149.15,80.066 149.15,80.7 149.43,80.98 149.43,81.515 C73.2@149.815,81.9 ; C73.2@150.001,81.951 150.2,82.15 150.2,82.85 151.65,84.3 XP11.5@156.375,84.3
  Bottom Layer w1: C115.1@28.275,6.1 28.475,6.1 29.075,5.5 29.075,5.3 29.54,4.835 DA20.2@29.54,2.6 ; DA8A13.2@57.85,7.155 57.927,7.078 59.597,7.078 60.65,6.025 C44A13.1@60.65,5.825 ; DA8A14.2@83.45,7.155 83.527,7.078 85.197,7.078 86.25,6.025 C44A14.1@86.25,5.825 ; C65.1@101.3,100.675 101.9,101.275 101.9,102.15 102.595,102.845 DA13.2@103.925,102.845 ; DA8A15.2@109.075,7.155 109.152,7.078 110.847,7.078 111.9,6.025 C44A15.1@111.9,5.825 ; C55.1@124.9,100.675 125.5,101.275 125.5,102.075 126.193,102.768 127.498,102.768 DA11.2@127.575,102.845 ; DA8A16.2@134.7,7.155 137.195,7.155 138.325,6.025 C44A16.1@138.325,5.825 138.325,5.625 139.31,4.64 DA1.2@143.95,4.64 144.007,4.697 144.247,4.697 146.45,6.9 C1.1@146.45,7.1 146.654,7.304 146.654,9.314 XP3.1@152.74,15.4 ; DA16.2@152.845,28.625 154.25,27.22 C81.1@154.25,25.6
+24V_HW: C116.2 C119.1 DA20.6 DA21.1 L7.1 R100.2 R101.2 R102.2 R103.2 | length 83
  Top Layer w0.5: L7.1@1.8,52.6 C116.2@1.8,54.5 v1(1.8,55.875) DA21.1@1.8,58.6
  Bottom Layer w0.5: v1(1.8,55.875) 5.3,59.375 11.5,59.375 12.95,57.925 12.95,54.05 15.5,51.5 20.175,51.5 22.6,49.075 R103.2@22.6,18.325 R102.2@22.6,15.8 R101.2@22.6,13.275 R100.2@22.6,10.7 22.6,8.55 21,6.95 20.25,6.95 C119.1@19.38,6.08
  Bottom Layer w0.7: DA20.6@19.38,2.6 C119.1@19.38,6.08
+24VA_HW: C121.1 C123.1 DA22.5 L7.2 | length 16.5
  Top Layer w0.3: DA22.5@13.425,52.3 13.55,52.175 DA22.5@13.55,52.15
  Top Layer w0.5: L7.2@1.8,50.6 1.9,50.5 1.9,49 C123.1@2,48.9 2,48.068 2.568,47.5 v1(5.2,47.5) ; v1(7.825,50.15) 9.25,50.15 11.225,52.125 11.625,52.125 C121.1@11.8,52.3 DA22.5@13.425,52.3
  Bottom Layer w0.5: v1(5.2,47.5) 5.2,47.512 7.825,50.137 v1(7.825,50.15)
+VBAT: DD1.6 GB1.2 | length 28.2
  Top Layer w0.3: DD1.6@75.05,68.55 75.05,69.575 75.825,70.35 99.652,70.35 100.725,69.277 GB1.2@100.725,68.55
ACTn: DD15.20 R60.2 | length 24.2
  Top Layer w0.3: DD15.20@128.575,60.95 128.575,63.264 127.8,64.039 127.8,69.4 130.375,71.975 137.3,71.975 139.8,69.475 R60.2@139.8,68.162
AGND: C3.2 C8.1 C11.1 C14.2 C29A1.1 C29A2.1 C29A3.1 C29A4.1 C29A5.1 C29A6.1 C31A1.2 C31A2.2 C31A3.2 C31A4.2 C31A5.2 C31A6.2 C32A1.2 C32A2.2 C32A3.2 C32A4.2 C32A5.2 C32A6.2 C33A1.2 C33A2.2 C33A3.2 C33A4.2 C33A5.2 C33A6.2 C34A1.2 C34A2.2 C34A3.2 C34A4.2 C34A5.2 C34A6.2 C35A1.2 C35A2.2 C35A3.2 C35A4.2 C35A5.2 C35A6.2 C36A1.2 C36A2.2 C36A3.2 C36A4.2 C36A5.2 C36A6.2 C37A7.2 C37A8.2 C37A9.2 C37A10.2 C112.2 C113.2 DA3A1.4 DA3A1.EPAD DA3A2.4 DA3A2.EPAD DA3A3.4 DA3A3.EPAD DA3A4.4 DA3A4.EPAD DA3A5.4 DA3A5.EPAD DA3A6.4 DA3A6.EPAD DA4A1.2 DA4A1.6 DA4A2.2 DA4A2.6 DA4A3.2 DA4A3.6 DA4A4.2 DA4A4.6 DA4A5.2 DA4A5.6 DA4A6.2 DA4A6.6 DA19.5 DD1.31 R1.2 R2.2 R9A1.2 R9A2.2 R9A3.2 R9A4.2 R9A5.2 R9A6.2 R12A1.2 R12A2.2 R12A3.2 R12A4.2 R12A5.2 R12A6.2 R15A1.1 R15A2.1 R15A3.1 R15A4.1 R15A5.1 R15A6.1 R16A1.1 R16A2.1 R16A3.1 R16A4.1 R16A5.1 R16A6.1 R94.2 XP1.2 XP1.4 XP1.6 XP1.8 XP1.10 XP1.12 XP2.2 XP2.4 XP2.6 XP2.8 | length 108.1
  Top Layer w0.3: 51.976,76.275 54.801,76.275 55.801,75.275 57.85,75.275 62.55,70.575 DD1.31@62.55,68.55
  Top Layer w0.5: XP1.12@1.55,87.3 XP1.10@1.55,89.3 XP1.8@1.55,91.3 XP1.6@1.55,93.3 XP1.4@1.55,95.3 XP1.2@1.55,97.3 ; XP2.8@1.625,75.575 XP2.6@1.625,77.575 XP2.4@1.625,79.575 XP2.2@1.625,81.575 ; C29A3.1@10.3,72.725 11.75,72.725 R9A3.2@12,72.475 ; C29A2.1@10.3,85.625 11.75,85.625 R9A2.2@12,85.375 ; C29A1.1@10.3,98.525 11.75,98.525 R9A1.2@12,98.275 ; C32A3.2@15.8,79.275 16.075,79.275 16.425,79.625 C31A3.2@16.425,80.975 ; C32A2.2@15.8,92.175 16.075,92.175 16.425,92.525 C31A2.2@16.425,93.875 ; C32A1.2@15.8,105.075 16.075,105.075 16.425,105.425 C31A1.2@16.425,106.775 ; C34A3.2@22.175,78.7 22.218,78.743 23.093,78.743 23.325,78.975 23.65,78.975 23.675,79 23.675,80.8 C35A3.2@23.85,80.975 C36A3.2@23.85,82.45 ; C34A1.2@22.175,104.55 22.182,104.557 23.107,104.557 23.325,104.775 23.65,104.775 23.675,104.8 23.675,106.6 C35A1.2@23.85,106.775 C36A1.2@23.85,108.25 ; C34A2.2@22.225,91.625 22.357,91.625 22.4,91.668 23.093,91.668 23.3,91.875 23.65,91.875 23.675,91.9 23.675,93.7 C35A2.2@23.85,93.875 C36A2.2@23.85,95.35 ; DA19.5@37.1,61.2 C113.2@38.8,61.2 ; C29A5.1@37.1,85.625 38.55,85.625 R9A5.2@38.8,85.375 ; C29A4.1@37.1,98.525 38.55,98.525 R9A4.2@38.8,98.275 ; C32A6.2@42.625,79.275 42.875,79.275 43.225,79.625 C31A6.2@43.225,80.975 ; C32A5.2@42.625,92.175 42.875,92.175 43.225,92.525 C31A5.2@43.225,93.875 ; C32A4.2@42.625,105.075 42.875,105.075 43.225,105.425 C31A4.2@43.225,106.775 ; C34A6.2@48.975,78.75 48.982,78.757 49.907,78.757 50.125,78.975 50.45,78.975 50.475,79 50.475,80.8 C35A6.2@50.65,80.975 C36A6.2@50.65,82.45 ; C34A5.2@48.975,91.65 48.982,91.657 49.907,91.657 50.125,91.875 50.45,91.875 50.475,91.9 50.475,93.7 C35A5.2@50.65,93.875 C36A5.2@50.65,95.35 ; C34A4.2@49.025,104.55 49.032,104.557 49.907,104.557 50.125,104.775 50.45,104.775 50.475,104.8 50.475,106.6 C35A4.2@50.65,106.775 C36A4.2@50.65,108.25
  Bottom Layer w0.5: XP1.12@1.55,87.3 XP1.10@1.55,89.3 XP1.8@1.55,91.3 XP1.6@1.55,93.3 XP1.4@1.55,95.3 XP1.2@1.55,97.3 ; XP2.8@1.625,75.575 XP2.6@1.625,77.575 XP2.4@1.625,79.575 XP2.2@1.625,81.575 ; C14.2@43.725,61.875 45.225,61.875 R2.2@45.4,61.7 45.4,60.55 45.125,60.275 ; C3.2@43.725,65.85 45.25,65.85 R1.2@45.4,65.7 44.22,64.52 43.92,64.52 43.825,64.425
  other v1: 32.235,57 34.445,57 38.865,57 41.075,58 41.075,60 32.235,65 34.445,65 36.655,65 38.865,65 41.075,65 32.235,67 34.445,67 36.655,67 38.865,67 41.075,67 30.025,69 32.235,69 34.445,69 36.655,69 38.865,69 41.075,69 1.125,70.425 4.175,70.55 1.25,72.875 4.1,72.95 9.55,75.725 10.5,75.725 9.55,79.075 10.5,79.075 41.2,79.95 35.2,80 38.075,80.05 49.025,81.025 9.55,81.65 10.5,81.65 16,83.025 22.25,83.025 32.075,84.1 34.5,84.1 37.275,84.1 42.875,84.1 48.275,84.1 53.05,84.1 50.575,84.25 1.1,84.325 3.975,84.4 13.825,85.1 8.475,88.6 8.55,93.175 10.575,93.175 12.825,93.175 34,93.175 36.6,93.175 39.375,93.175 16.25,95.8 22.1,95.8 28.325,95.8 31.3,95.8 34,95.8 36.6,95.8 39.375,95.8 41.975,95.8 44.95,95.8 49,95.8 54.825,95.8 41.975,97.725 34,97.8 44.95,97.775 57.1,97.775 60.775,98.025 31.35,99.6 29.075,99.7 2.9,99.825 35.2,99.9 0.45,100 5.9,100.075 60.775,101.025 60.9,106.45 9.625,106.525 12.625,106.525 35.7,106.725 39.475,106.725 22.25,106.85 9.45,109.175 12.55,109.175 15.8,109.175 19,109.175 22.375,109.175 28.65,109.175 32.225,109.175 35.7,109.175 39.475,109.175 42.825,109.175 46.275,109.175 54.2,109.175 57.925,109.175 61,109.175
  other v2: 16.4,74.425 17.2,74.425 18,74.425 43.2,74.425 44,74.425 44.8,74.425 16.4,75.125 17.2,75.125 18,75.125 43.2,75.125 44,75.125 44.8,75.125 16.4,75.825 17.2,75.825 18,75.825 43.2,75.825 44,75.825 44.8,75.825 16.4,76.525 17.2,76.525 18,76.525 43.2,76.525 44,76.525 44.8,76.525 16.4,87.325 17.2,87.325 18,87.325 43.2,87.325 44,87.325 44.8,87.325 16.4,88.025 17.2,88.025 18,88.025 43.2,88.025 44,88.025 44.8,88.025 16.4,88.725 17.2,88.725 18,88.725 43.2,88.725 44,88.725 44.8,88.725 16.4,89.425 17.2,89.425 18,89.425 43.2,89.425 44,89.425 44.8,89.425 16.4,100.225 17.2,100.225 18,100.225 43.2,100.225 44,100.225 44.8,100.225 16.4,100.925 17.2,100.925 18,100.925 43.2,100.925 44,100.925 44.8,100.925 16.4,101.625 17.2,101.625 18,101.625 43.2,101.625 44,101.625 44.8,101.625 16.4,102.325 17.2,102.325 18,102.325 43.2,102.325 44,102.325 44.8,102.325
AGND_HW: C105.2 C120.2 C121.2 C122.2 C123.2 DA18.5 DA22.2 R71.2 R78.2 R90.2 R109.2 R110.1 R111.2 U9.1 XP14.14 | length 36.3
  Top Layer w0.3: XP14.14@1.6,28.5 0.5,29.6 0.5,41.625 1.675,42.8 4.65,42.8 6.45,44.6 6.45,50.469 6.6,50.619 v1(6.6,50.7) ; R109.2@10.1,53.5 R109.2@10.35,53.75 ; C121.2@11.8,50.75 11.849,50.701 11.849,50.051 12.925,48.975 14.05,48.975 14.375,49.3 14.375,49.875 DA22.2@14.5,50
  Top Layer w0.5: R109.2@10.35,53.75 C122.2@11.8,53.75 ; R71.2@12.75,58.15 12.75,59.55 R78.2@12.7,59.6 R90.2@14.2,59.6
  other v1: 5.2,48.9 7.8,48.9 5.2,50.7 15.5,55.3 16.7,55.3 18,55.3 19.3,55.3 11.1,56.8 12.1,56.8 13.8,56.8 15.5,56.8 16.7,56.8 8.4,56.9 9.5,56.9 8.4,58.1 9.5,58.1 8.4,60.1 9.5,60.1 8.4,61.6 9.5,61.6 8.4,66.6 10.6,66.6 12.9,66.6 15.3,66.6 8.4,67.7 10.6,67.7 12.9,67.7 15.3,67.7 17.6,67.7
AN_MOD_HW: R71.1 R74.1 XP14.12 | length 34.7
  Top Layer w0.5: v1(10.375,58.15) R71.1@11.2,58.15 R74.1@11.2,59.6
  Bottom Layer w0.5: XP14.12@1.6,30.5 2.6,31.5 4.494,31.5 10.375,37.381 v1(10.375,58.15)
COM1_HW: R73.2 R80.1 XP14.17 | length 7.5
  Top Layer w0.5: XP14.17@3.6,24.5 6.4,27.3 R80.1@8.4,27.3 R73.2@8.4,28.8
COM2_HW: R76.2 R87.1 XP14.18 | length 9
  Top Layer w0.5: XP14.18@1.6,24.5 2.6,23.5 5.107,23.5 5.907,24.3 R87.1@8.4,24.3 R76.2@8.4,25.8
COM3_HW: R79.2 R81.1 XP14.21 | length 6.6
  Top Layer w0.5: XP14.21@3.6,20.5 3.789,20.5 4.589,21.3 R81.1@8.4,21.3 R79.2@8.4,22.8
CRASH_COL: DD1.128 R52.2 | length 85.9
  Top Layer w0.3: DD1.128@79.525,58.575 93.711,58.575 97.336,62.2 114.074,62.2 137.8,85.926 137.8,97.675 140.35,100.225 R52.2@141.25,100.225
CRASH_IND: DD1.125 R49.2 | length 73.9
  Top Layer w0.3: DD1.125@79.525,57.075 94.121,57.075 97.896,60.85 114.65,60.85 140.15,86.35 R49.2@141.25,86.35
DIG_MOD_HW: R70.2 R86.1 XP14.15 | length 7.9
  Top Layer w0.5: XP14.15@3.6,26.5 7.4,30.3 R86.1@8.4,30.3 R70.2@8.4,31.8
DRV1_AN_MOD: DD1.96 DD4A13.5 | length 37
  Top Layer w0.3: v1(71.15,45.875) 71.15,45.901 71.55,46.301 DD1.96@71.55,47.1
  Top Layer w0.5: v1(49.65,23.425) 49.655,23.43 49.655,25.02 DD4A13.5@49.66,25.025
  Bottom Layer w0.3: v1(49.65,23.425) 50.35,22.725 52.55,22.725 53.575,23.75 53.575,28.3 v1(71.15,45.875)
DRV1_DIG_MOD: DA7A13.3 DD1.81 | length 33.5
  Top Layer w0.3: DD1.81@64.05,47.1 v1(64.05,48.425)
  Top Layer w0.5: v1(48.8,27.175) DA7A13.3@48.8,27.9
  Bottom Layer w0.3: v1(48.8,27.175) 48.8,31.55 50.5,33.25 57.2,33.25 64.05,40.1 v1(64.05,48.425)
DRV1_ERR1: DD1.75 DD5A13.7 | length 40.5
  Top Layer w0.3: v1(56.437,34.838) 56.438,34.838 61.05,39.45 DD1.75@61.05,47.1
  Top Layer w0.5: v1(41.1,20.125) DD5A13.7@41.1,21.425
  Bottom Layer w0.3: v1(41.1,20.125) 41.1,26.275 49.663,34.838 v1(56.437,34.838)
DRV1_ERR2: DD1.76 DD5A13.6 | length 40
  Top Layer w0.3: v1(56.425,34) 56.475,34 61.55,39.075 DD1.76@61.55,47.1
  Top Layer w0.5: v1(42.4,20.125) DD5A13.6@42.4,21.425
  Bottom Layer w0.3: v1(42.4,20.125) 42.4,26.4 50,34 v1(56.425,34)
DRV1_ON: DD1.73 DD4A13.3 | length 28.4
  Top Layer w0.3: v1@52.425,32.525 60.05,40.15 DD1.73@60.05,47.1
  Top Layer w0.5: v1(52.2,23.425) DD4A13.3@52.2,25.025
  Bottom Layer w0.3: v1(52.2,23.425) v1(52.2,32.525)
DRV1_SEL_MOD: DA7A13.6 DD1.74 | length 21.5
  Top Layer w0.3: DA7A13.6@50.95,29.8 51.275,29.8 51.4,29.925 51.4,30.65 60.55,39.8 DD1.74@60.55,47.1
DRV2_AN_MOD: DD1.97 DD4A14.5 | length 26.8
  Top Layer w0.3: v1(71.782,45.207) 71.782,45.806 72.05,46.074 DD1.97@72.05,47.1
  Top Layer w0.5: DD4A14.5@75.295,25.025 75.297,25.023 75.297,23.427 v1(75.3,23.425)
  Bottom Layer w0.3: v1(71.782,45.207) 75.3,41.69 v1(75.3,23.425)
DRV2_DIG_MOD: DA7A14.3 DD1.82 | length 24.7
  Top Layer w0.3: DD1.82@64.55,47.1 64.55,44.4 v1(74.425,34.525)
  Top Layer w0.5: v1(74.425,27.175) DA7A14.3@74.425,27.9
  Bottom Layer w0.3: v1(74.425,27.175) v1(74.425,34.525)
DRV2_ERR1: DD1.79 DD5A14.7 | length 29.8
  Top Layer w0.3: DD1.79@63.05,47.1 63.05,44.151 v1(66.738,40.463)
  Top Layer w0.5: v1(66.725,20.125) DD5A14.7@66.725,21.425
  Bottom Layer w0.3: v1(66.725,20.125) 66.725,40.45 v1(66.738,40.463)
DRV2_ERR2: DD1.80 DD5A14.6 | length 30.1
  Top Layer w0.3: DD1.80@63.55,47.1 63.55,44.5 v1(68.05,40)
  Top Layer w0.5: v1(68.025,20.125) DD5A14.6@68.025,21.425
  Bottom Layer w0.3: v1(68.025,20.125) 68.025,39.975 v1(68.05,40)
DRV2_ON: DD1.77 DD4A14.3 | length 34.7
  Top Layer w0.3: DD1.77@62.05,47.1 62.05,46.437 62.1,46.387 62.1,43.1 v1(72.575,32.625)
  Top Layer w0.5: v1(77.825,23.425) 77.83,23.43 77.83,25.02 DD4A14.3@77.835,25.025
  Bottom Layer w0.3: v1(72.575,32.625) 72.575,24.7 74.55,22.725 77.125,22.725 v1(77.825,23.425)
DRV2_SEL_MOD: DA7A14.6 DD1.78 | length 23.9
  Top Layer w0.3: DD1.78@62.55,47.1 62.55,43.757 73.782,32.525 75.125,32.525 76.575,31.075 DA7A14.6@76.575,29.8
DRV3_AN_MOD: DD1.98 DD4A15.5 | length 44.6
  Top Layer w0.3: v1(72.45,45.625) 72.45,45.706 72.55,45.806 DD1.98@72.55,47.1
  Top Layer w0.5: v1(100.925,23.425) 100.93,23.43 100.93,25.02 DD4A15.5@100.935,25.025
  Bottom Layer w0.3: v1(72.45,45.625) 83.275,34.8 93.9,34.8 95.275,33.425 95.275,26.925 98.775,23.425 v1(100.925,23.425)
DRV3_DIG_MOD: DA7A15.3 DD1.85 | length 44.2
  Top Layer w0.3: DD1.85@66.05,47.1 66.05,45 80.475,30.575 v1(96.65,30.575)
  Top Layer w0.5: v1(100.05,27.175) DA7A15.3@100.05,27.9
  Bottom Layer w0.3: v1(96.65,30.575) v1(100.05,27.175)
DRV3_ERR1: DD1.89 DD5A15.7 | length 45.4
  Top Layer w0.3: DD1.89@68.05,47.1 68.05,45.546 80.321,33.275 v1(92.35,33.275)
  Top Layer w0.5: v1(92.375,20.125) DD5A15.7@92.375,21.425
  Bottom Layer w0.3: v1(92.35,33.275) 92.363,33.263 92.363,20.137 v1(92.375,20.125)
DRV3_ERR2: DD1.90 DD5A15.6 | length 46.5